# Altium PCB PONG.PcbDoc
Units mm, origin at the board's own origin, x right, y up, seen from the top; angles counter-clockwise.
Board outline 317.75 x 199.14 mm, 2 copper layers (Top Layer, Bottom Layer); 106 components, 226 nets, 1002 pads, 0 vias.
Unrouted connection lines stored in the file: 561.
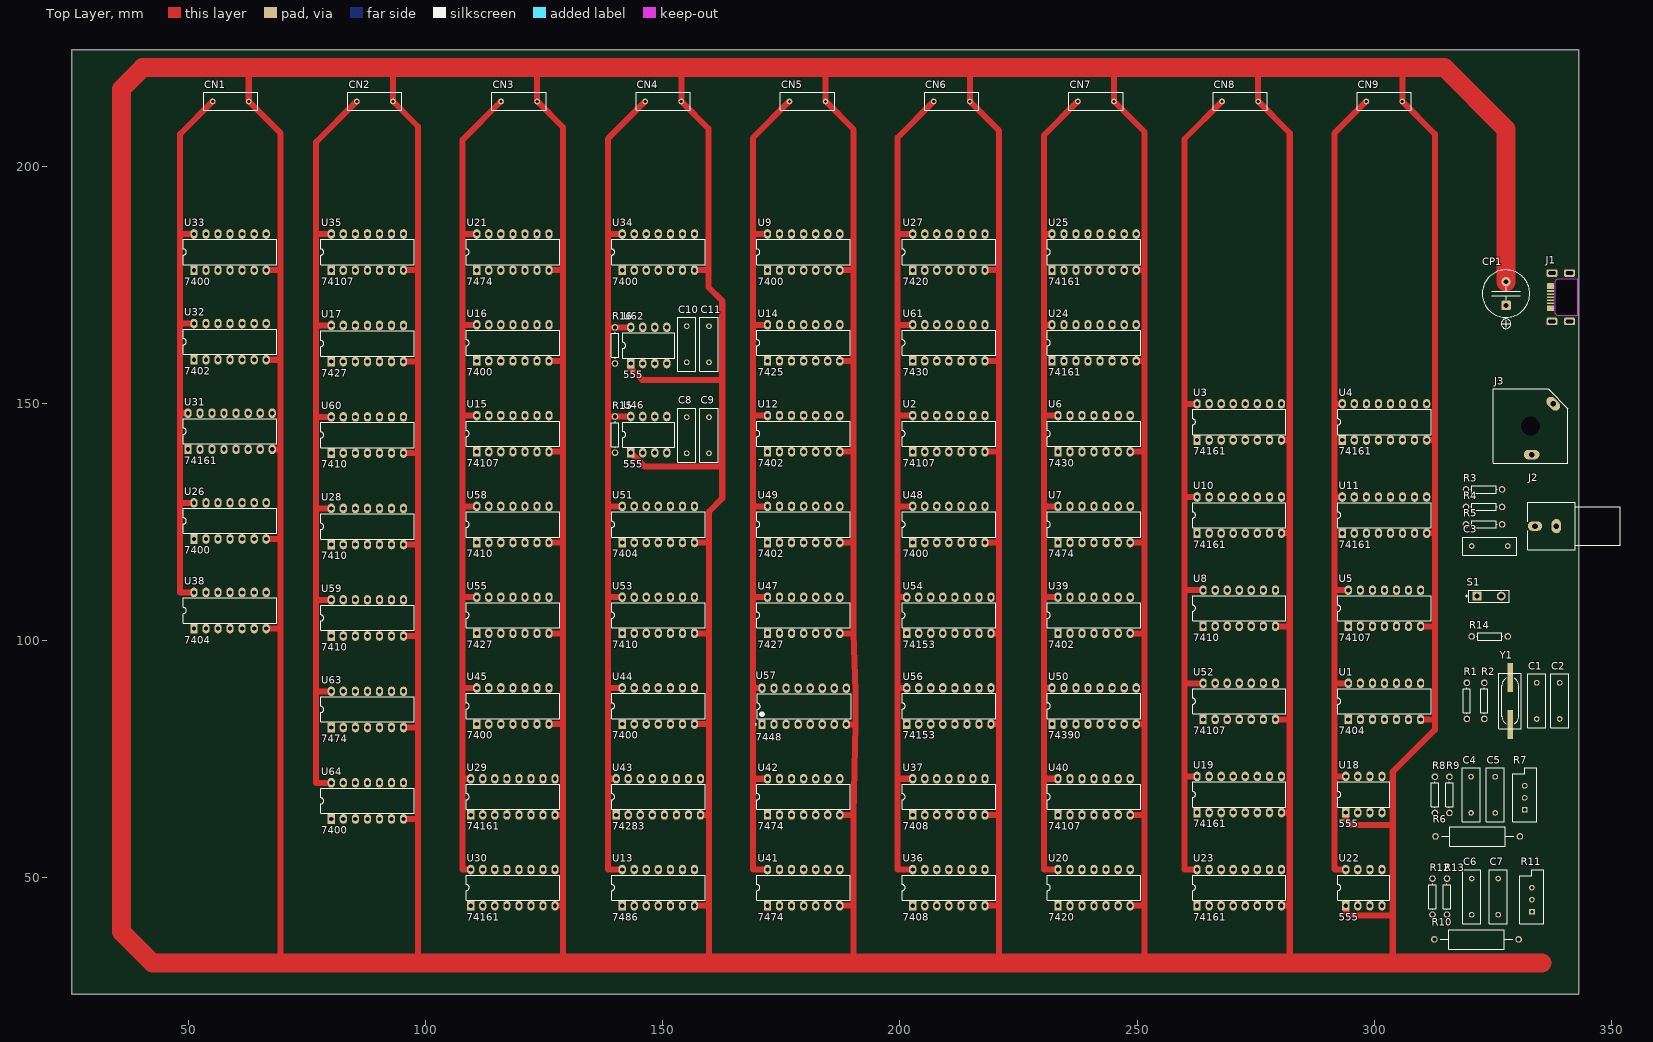
[diagram p0: Top Layer view]
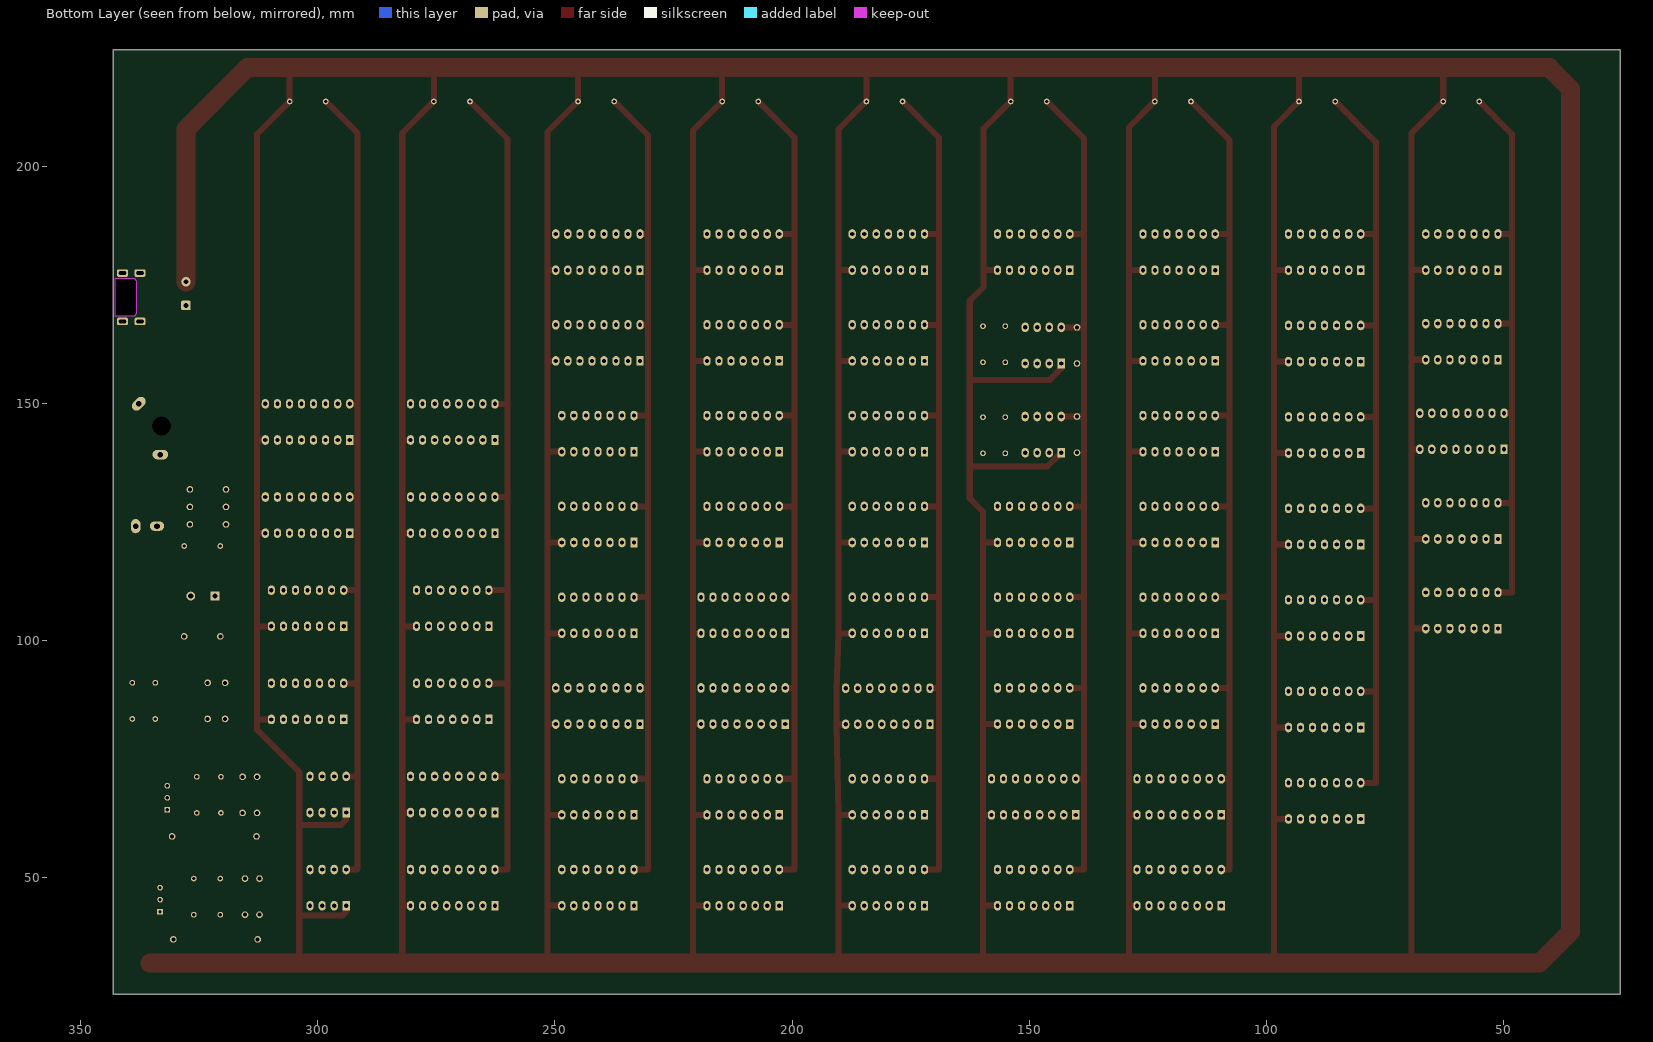
[diagram p1: Bottom Layer view, seen from below]

## Layer stack, top to bottom
Top Solder: solder mask 0.0102, Solder Resist, Dk 3.5
Top Layer: signal copper 0.0356
Dielectric 1: dielectric 0.32, FR-4, Dk 4.8
Bottom Layer: signal copper 0.0356
Bottom Solder: solder mask 0.0102, Solder Resist, Dk 3.5

## Board outline
25.4,25.4 343.154,25.4 343.154,224.536 25.4,224.536

## Design rules (kind name [scope] priority, off if disabled: settings)
Clearance TracksClearance [(OnLayer('Top Layer') OR OnLayer('Bottom Layer'))] p1: gap=0.18 except(1: Track-Track)
Clearance [All] p2: gap=0.18
PolygonConnect [All] p1: connectstyle=Relief reliefconductorwidth=0.254 reliefentries=4 polygonreliefangle="90 Angle" airgapwidth=0.254
RoutingTopology VCC_GND_Shortest [(InNet('VCC') OR InNet('GND'))] p1: topology=Shortest
RoutingTopology HorizBot [OnLayer('Bottom Layer')] p2: topology=Horizontal
RoutingTopology VertTop [OnLayer('Top Layer')] p3: topology=Vertical
RoutingTopology [All] p4: topology=Shortest
RoutingVias [All] p1: holewidth=0.711 width=1.27 viastyle="Through Hole" minholewidth=0.711 minwidth=1.27 maxholewidth=0.711 maxwidth=1.27
SMDNeckDown [All] p1: percent=50.000
SolderMaskExpansion [All] p1: expansion=0.102
Width "Power Width" [(InNet('VCC') OR InNet('GND'))] p1: maxlimit=4 minlimit=0.508 preferedwidth=0.508
Width [All] p2: maxlimit=0.508 minlimit=0.508 preferedwidth=0.508
29 further rules are at their usual default settings.

## Classes and differential pairs
component class VSYNC: U10 U11 U12
component class VertBallCounter: U29 U30
component class VertBallControl: U36 U37 U38 U39 U40 U41 U42 U43
component class SYNC-VideoSum: C3 J2 R3 R4 R5 U13 U14
component class Sound: C10 C11 J3 R16 U62 U63 U64
component class ScoreDisplay_2: U58 U59 U60 U61
component class ScoreDisplay_1: U54 U55 U56 U57
component class ScoreCount: U49 U50 U51 U52 U53
component class POWER: CN1 CN2 CN3 CN4 CN5 CN6 CN7 CN8 CN9 CP1 J1
component class Paddle_2: C6 C7 R10 R11 R12 R13 U21 U22 U23
component class Paddle_1: C4 C5 R6 R7 R8 R9 U18 U19 U20
component class Net: U15 U16 U17
component class HSYNC: U3 U4 U5 U6 U7 U8 U9
component class HorizBallCounter: U24 U25 U26 U27 U28
component class HorizBallControl: U31 U32 U33 U34 U35
component class GameControl: C8 C9 R14 R15 S1 U44 U45 U46 U47 U48
component class CLK: C1 C2 R1 R2 U1 U2 Y1

## Components (designator, comment, footprint, x,y, rotation, side; value= is the part's Value field where it differs from the comment)
C1 "Cap" RAD-0.3 334.264,87.249 r270 top
C2 "Cap" RAD-0.3 339.09,87.249 r270 top
C3 "Cap" RAD-0.3 324.358,119.888 r0 top
C4 "Cap" RAD-0.3 320.421,67.437 r90 top
C5 "Cap" RAD-0.3 325.501,67.437 r90 top
C6 "Cap" RAD-0.3 320.548,45.974 r90 top
C7 "Cap" RAD-0.3 326.136,45.974 r270 top
C8 "Cap" RAD-0.3 155.067,143.256 r90 top
C9 "Cap" RAD-0.3 159.766,143.256 r90 top
C10 "Cap" RAD-0.3 155.067,162.433 r90 top
C11 "Cap" RAD-0.3 159.766,162.433 r90 top
CN1 "Cap" RAD-0.3 58.928,213.614 r180 top
CN2 "Cap" RAD-0.3 89.329,213.614 r180 top
CN3 "Cap" RAD-0.3 119.729,213.614 r180 top
CN4 "Cap" RAD-0.3 150.13,213.614 r180 top
CN5 "Cap" RAD-0.3 180.53,213.614 r180 top
CN6 "Cap" RAD-0.3 210.931,213.614 r180 top
CN7 "Cap" RAD-0.3 241.332,213.614 r180 top
CN8 "Cap" RAD-0.3 271.732,213.614 r180 top
CN9 "Cap" RAD-0.3 302.133,213.614 r180 top
CP1 "Cap" CAPE10.0MM_Rad_10x14mm 327.787,173.101 r90 top
J1 "USB Micro Type B (recommended if hand soldering)" USB_Micro-B_FCI_SMD 342.773,172.339 r90 top
J2 "Video OUT" RCA/4.5-H2 342.392,124.079 r0 top
J3 "Audio OUT" JACK/6-V2 332.994,145.161 r270 top
R1 "Res1" AXIAL-0.3 319.532,87.249 r270 top
R2 "Res1" AXIAL-0.3 323.215,87.249 r270 top
R3 "Res1" AXIAL-0.3 323.155,131.826 r0 top
R4 "Res1" AXIAL-0.3 323.155,128.143 r0 top
R5 "Res1" AXIAL-0.3 323.155,124.46 r0 top
R6 "Res Adj1" AXIAL-0.7 321.818,58.674 r0 top
R7 "RPot" VR5 331.724,66.802 r90 top
R8 "Res1" AXIAL-0.3 312.801,67.437 r270 top
R9 "Res1" AXIAL-0.3 315.849,67.437 r270 top
R10 "Res Adj1" AXIAL-0.7 321.564,36.957 r0 top
R11 "RPot" VR5 333.248,45.339 r90 top
R12 "Res1" AXIAL-0.3 312.293,45.974 r270 top
R13 "Res1" AXIAL-0.3 315.341,45.974 r270 top
R14 "Res1" AXIAL-0.3 324.358,100.838 r180 top
R15 "Res1" AXIAL-0.3 139.954,143.383 r90 top
R16 "Res1" AXIAL-0.3 139.954,162.179 r90 top
S1 "COIN SW" SPST-2 324.231,109.347 r0 top
U1 "7404" N014 302.165,87.147 r0 top
U2 "74107" N014D 210.328,143.583 r0 top
U3 "74161" N016 271.553,146.05 r0 top
U4 "74161" N016 302.165,146.05 r0 top
U5 "74107" N014 302.165,106.782 r0 top
U6 "7430" N014 240.94,143.583 r0 top
U7 "7474" N014D 240.94,124.442 r0 top
U8 "7410" N014 271.553,106.782 r0 top
U9 "7400" N014 179.716,181.864 r0 top
U10 "74161" N016 271.553,126.416 r0 top
U11 "74161" N016 302.165,126.416 r0 top
U12 "7402" N014 179.716,143.583 r0 top
U13 "7486" N014 149.089,47.879 r0 top
U14 "7425" N014 179.716,162.723 r0 top
U15 "74107" N014 118.423,143.583 r0 top
U16 "7400" N014 118.423,162.723 r0 top
U17 "7427" N014 87.757,162.581 r0 top
U18 "555" P008 297.815,67.513 r0 top
U19 "74161" N016 271.553,67.513 r0 top
U20 "7420" N014 240.94,47.879 r0 top
U21 "7474" N014D 118.423,181.864 r0 top
U22 "555" P008 297.815,47.879 r0 top
U23 "74161" N016 271.553,47.879 r0 top
U24 "74161" N016 240.94,162.723 r0 top
U25 "74161" N016 240.94,181.864 r0 top
U26 "7400" N014 58.801,125.19 r0 top
U27 "7420" N014 210.328,181.864 r0 top
U28 "7410" N014 87.757,124.015 r0 top
U29 "74161" N016 118.423,67.02 r0 top
U30 "74161" N016 118.423,47.879 r0 top
U31 "74161" N016 58.801,144.082 r0 top
U32 "7402" N014 58.801,162.973 r0 top
U33 "7400" N014 58.801,181.864 r0 top
U34 "7400" N014 149.089,181.864 r0 top
U35 "74107" N014 87.757,181.864 r0 top
U36 "7408" N014 210.328,47.879 r0 top
U37 "7408" N014 210.328,67.02 r0 top
U38 "7404" N014 58.801,106.299 r0 top
U39 "7402" N014 240.94,105.301 r0 top
U40 "74107" N014 240.94,67.02 r0 top
U41 "7474" N014D 179.716,47.879 r0 top
U42 "7474" N014D 179.716,67.02 r0 top
U43 "74283" N016D#1 149.089,67.02 r0 top
U44 "7400" N014 149.089,86.16 r0 top
U45 "7400" N014 118.423,86.16 r0 top
U46 "555" P008 147.066,143.383 r0 top
U47 "7427" N014 179.716,105.301 r0 top
U48 "7400" N014 210.328,124.442 r0 top
U49 "7402" N014 179.716,124.442 r0 top
U50 "74390" N016 240.94,86.16 r0 top
U51 "7404" N014 149.089,124.442 r0 top
U52 "74107" N014 271.553,87.147 r0 top
U53 "7410" N014 149.089,105.301 r0 top
U54 "74153" N016 210.328,105.301 r0 top
U55 "7427" N014 118.423,105.301 r0 top
U56 "74153" N016 210.328,86.16 r0 top
U57 "7448" N016D#2 179.832,86.106 r90 top
U58 "7410" N014 118.423,124.442 r0 top
U59 "7410" N014 87.757,104.733 r0 top
U60 "7410" N014 87.757,143.298 r0 top
U61 "7430" N014 210.328,162.723 r0 top
U62 "555" P008 147.066,162.179 r0 top
U63 "7474" N014D 87.757,85.45 r0 top
U64 "7400" N014 87.757,66.167 r0 top
Y1 "14.318 Mhz" XTAL-RU49/4 328.676,82.296 r90 top

## Footprints (in the part's own frame and the unit in brackets; to place one, negate y for a bottom-side part, rotate by r counter-clockwise, add the part's x,y. Pads: shape width x height; smd on the part's side, far side on the other; paste and mask are expansions set on the pad)
AXIAL-0.3 [mm] "Axial Device, Thru-Hole; 2 Leads; 0.3 in Pin Spacing"
  round 1.4 hole 0.85: 1(-3.81,0) 2(3.81,0)
  silkscreen extent -2.77,-0.76 2.77,0.76
AXIAL-0.7 [mm] "Axial Device, Thru-Hole; 2 Leads; 0.7 in Pin Spacing"
  round 1.4 hole 0.85: 1(-8.89,0) 2(8.89,0)
  silkscreen extent -7.62,-2.03 7.62,2.03
CAPE10.0MM_Rad_10x14mm [mm] "10mm Pitch Radial Capacitor 10x14mm DxH"
  round 0.5 on Mech15: 0(0,0)
  rrect25% 2x2 hole 0.965: 1(-2.5,0)
  round 2 hole 0.965: 2(2.5,0)
  silkscreen extent -7.37,-5 5,5, body extent -5.25,-5.24 5.21,5.24, height 13.99
JACK/6-V2 [mm] "Connector; Jack Socket, 1/4\" [6.5mm], Thru-Hole, 2 Position, Vertical, Body 15.7 x 15.7 x 31 mm (WxTxH)"
  oval 2x3.3 hole 1.2: 1(6,0.2)
  oval 2x3.3 hole 1.2 rot 135: 5(-4.738,4.738)
  round 3.7 hole 4: MH1(0,0)
  silkscreen extent -7.85,-7.85 7.85,7.85
N014 [mil] "DIP; 14 Leads; Row Spacing 7.62 mm; Pitch 2.54 mm"
  rect 60x80 hole 35.43: 1(-300,-150)
  oval 60x80 hole 35.43: 2(-200,-150) 3(-100,-150) 4(0,-150) 5(100,-150) 6(200,-150) 7(300,-150) 8(300,150) 9(200,150) 10(100,150) 11(0,150) 12(-100,150) 13(-200,150) 14(-300,150)
  silkscreen extent -388,-104 388,104
N014D [mil] "DIP; 14 Leads; Row Spacing 7.62 mm; Pitch 2.54 mm"
  rect 60x80 hole 35.43: 1(-300,-150)
  oval 60x80 hole 35.43: 2(-200,-150) 3(-100,-150) 4(0,-150) 5(100,-150) 6(200,-150) 7(300,-150) 8(300,150) 9(200,150) 10(100,150) 11(0,150) 12(-100,150) 13(-200,150) 14(-300,150)
  silkscreen extent -388,-104 388,104
N016 [mil] "DIP; 16 Leads; Row Spacing 7.62 mm; Pitch 2.54 mm"
  rect 60x80 hole 35.43: 1(-350,-150)
  oval 60x80 hole 35.43: 2(-250,-150) 3(-150,-150) 4(-50,-150) 5(50,-150) 6(150,-150) 7(250,-150) 8(350,-150) 9(350,150) 10(250,150) 11(150,150) 12(50,150) 13(-50,150) 14(-150,150) 15(-250,150) 16(-350,150)
  silkscreen extent -388,-104 388,104
N016D#1 [mil] "DIP; 16 Leads; Row Spacing 7.62 mm; Pitch 2.54 mm"
  rect 60x80 hole 35.43: 1(-350,-150)
  oval 60x80 hole 35.43: 2(-250,-150) 3(-150,-150) 4(-50,-150) 5(50,-150) 6(150,-150) 7(250,-150) 8(350,-150) 9(350,150) 10(250,150) 11(150,150) 12(50,150) 13(-50,150) 14(-150,150) 15(-250,150) 16(-350,150)
  silkscreen extent -388,-104 388,104
N016D#2 [mil] "DIP, 16-Leads, Row Spacing 7.62mm, Pitch 2.54mm, Body 19.31x6.35mm"
  rect 80x60 hole 35.43: 1(-150,350)
  oval 80x60 hole 35.43: 2(-150,250) 3(-150,150) 4(-150,50) 5(-150,-50) 6(-150,-150) 7(-150,-250) 8(-150,-350) 9(150,-350) 10(150,-250) 11(150,-150) 12(150,-50) 13(150,50) 14(150,150) 15(150,250) 16(150,350)
  silkscreen extent -155,-390 104,406, body extent -130,-390 130,390, height 200
P008 [mil] "DIP; 8 Leads; Row Spacing 7.62 mm; Pitch 2.54 mm"
  rect 60x80 hole 35.43: 1(-150,-150)
  oval 60x80 hole 35.43: 2(-50,-150) 3(50,-150) 4(150,-150) 5(150,150) 6(50,150) 7(-50,150) 8(-150,150)
  silkscreen extent -217,-104 217,104
RAD-0.3 [mm] "Radial Cap, Thru-Hole; 2 Leads; 0.3 in Pin Spacing"
  round 1.2 hole 0.7: 1(-3.81,0) 2(3.81,0)
  silkscreen extent -5.71,-1.91 5.72,1.91
RCA/4.5-H2 [mm] "Two Conductor Jack (RCA), Right Angle, Thru-Hole, Body 10 x 10 x 13 mm (WxTxH)"
  oval 2x3 hole 1.2: 1A(-4,0)
  oval 3x2 hole 1.2: 2B(-8.496,0)
  silkscreen extent -10.07,-5 9.5,5
SPST-2 [mm] "Switch; 2 Leads"
  rect 1.85x1.85 hole 1.1: 1(-2.54,0)
  round 1.85 hole 1.1: 2(2.54,0)
  silkscreen extent -4.89,-1.27 4.28,1.27
USB_Micro-B_FCI_SMD [mm]
  round 0.508 on Mech15: 0(0,0)
  rrect20% 0.35x1.5 smd: 1(-1.3,5.6) 2(-0.65,5.6) 3(0,5.6) 4(0.65,5.6) 5(1.3,5.6)
  rrect50% 1.6x2.4 hole 0.8 slot 1.5 at 90 deg: SH(-5.1,1.6) SH(-5.1,5.3) SH(5.1,1.6) SH(5.1,5.3)
  rrect20% 1.2x1.5 smd: SH(-2.35,5.6) SH(2.35,5.6)
  Keep-Out Layer board cut-out: -3.9,0 -3.9,3.797 -3.839,4.103 -3.666,4.362 -3.406,4.536 -3.1,4.597 -3.1,4.597 3.1,4.597 3.406,4.536 3.666,4.362 3.839,4.103 3.9,3.797 3.9,3.797 3.9,0
  body extent -5.35,-21.58 5.35,5.8, height 4.67
VR5 [mm] "Thru-Hole; 3 Leads"
  rect 1.2x1.2 hole 0.7: 1(-2.54,0)
  round 1.2 hole 0.7: 2(0,0) 3(2.54,0)
  silkscreen extent -5.08,-2.54 6.35,2.54
XTAL-RU49/4 [mil]
  rect 240x47.24 smd: 1(0,0) 2(390,0)
  silkscreen extent -35,-90 425,95, body extent -78,-90 468,95, height 120

## Part data
C1 C2 C3 C4 C5 C6 C7 C8 C9 C10 C11 CN1 CN2 CN3 CN4 CN5 CN6 CN7 CN8 CN9 CP1: "Capacitor"
J1: library part USB_Micro_TypeB_FCI, "Connector SMD-THD USB Micro Type B middle mount"
J2: library part RCA, "RCA Phono Jack, Right Angle, Thru-Hole, Snap-In"
J3: library part Phonejack2, "Jack Socket, 1/4\" [6.5mm], Thru-Hole, Vertical, 2-Conductor Open Circuit"
R1 R2 R3 R4 R5 R8 R9 R12 R13 R14 R15 R16: "Resistor"
R6 R10: "Variable Resistor"
R7 R11: "Potentiometer"
S1: library part SW-PB, "Switch"
U1 U38 U51: library part SN74LS04N, "Hex Inverter"
U2: library part SN74HC107N, "Dual J-K Negative-Edge-Triggered Flip-Flop with Clear"
U3 U4 U10 U11 U19 U23 U24 U25 U29 U30 U31: library part SN74LS161AN, "Synchronous 4-Bit Counter"
U5 U15 U35 U40 U52: library part SN74LS107AN, "Dual J-K Flip-Flop with Clear"
U6 U61: library part SN74LS30N, "8-Input Positive-NAND Gate"
U7 U21 U41 U42 U63: library part SN74LS74AN, "Dual D-Type Positive-Edge-Triggered Flip-Flop with Preset and Clear"
U8 U28 U53 U58 U59 U60: library part SN74LS10N, "Triple 3-Input Positive-NAND Gate"
U9 U16 U26 U33 U34 U44 U45 U48 U64: library part SN74LS00N, "Quadruple 2-Input Positive-NAND Gate"
U12 U32 U39 U49: library part SN74LS02N, "Quadruple 2-Input Positive-NOR Gate"
U13: library part SN74LS86AN, "Quadruple 2-Input Exclusive-OR Gate"
U14: library part SN7425N, "Dual 4-Input NOR Gate with Strobe"
U17 U47 U55: library part SN74LS27N, "Triple 3-Input Positive-NOR Gate"
U18 U22 U46 U62: library part NE555P, "Precision Timer"
U20 U27: library part SN74LS20N, "Dual 4-Input Positive-NAND Gate"
U36 U37: library part SN74LS08N, "Quadruple 2-Input Positive-AND Gate"
U43: library part SN54S283FK, "4-Bit Binary Full Adder with Fast Carry"
U50: library part SN74LS390N, "Dual 4-Bit Decade and Binary Counter"
U54 U56: library part SN74LS153N, "Dual 4-Line to 1-Line Data Selector/Multiplexer"
U57: library part SN74LS48N, "BCD-to-Seven-Segment Decoder/Driver"
Y1: library part XTAL, "Crystal Oscillator"

## Nets (pads, with @x,y where several pads share a name; then routed paths per layer and width w, separated by ;. In a path a pad name is that pad's centre, name@x,y a point inside that pad or via, vN(x,y) a via of type N, cw(c..) or ccw(c..) an arc to the next point about the centre after c; other vN are vias at no path point)
1H: U3.14
1V: U8.3 U10.14
2H: U3.13 U6.1
2V: U10.13
4H: U3.12 U6.2 U21.3 U48.12 U53.9 U55.3 U55.9
4V: U8.4 U8.10 U10.12 U17.1
7S_A: U57.13 U59.3
7S_B: U57.12 U58.9
7S_C: U57.11 U59.2
7S_D: U57.10 U60.13
7S_E: U57.9 U58.5
7S_F: U57.15 U58.2
7S_G: U57.14 U59.9
8H: U3.11 U48.13 U53.10 U55.4 U55.10
8V: U9.12 U9.13 U10.11
16H: U4.14 U8.1 U9.10 U51.3 U53.11
16V: U11.14 U12.6 U51.5 U58.4 U59.13 U60.2
32H: U4.13 U54.14 U56.14
32V: U11.13 U49.8 U49.9 U64.1
64H: U4.12 U6.6 U8.2 U8.13 U47.10 U53.4 U54.2 U56.2
64V: U11.12 U14.12
128H: U4.11 U6.11 U16.9 U21.2 U47.3 U47.4 U47.5
128V: U11.11 U14.10
256H: U5.3 U6.12 U15.1 U16.1 U17.3 U36.5 U36.13 U37.5 U47.9 U53.5
256V: U5.5 U8.5
\256H: U5.2 U15.4 U17.11 U32.5 U36.2 U36.10 U37.2
\256V: U5.6 U18.2 U22.2
\ATTRACT: U21.4 U26.1 U38.13 U39.4
\CLR: U15.10 U24.1 U25.1 U26.3
\HBLANK: U9.3 U9.4 U24.10
\HIT: U48.3 U63.1
\HIT1: U21.13 U45.8 U45.13
\HIT2: U21.10 U45.6 U45.12
\HRESET: U3.1 U4.1 U5.13 U7.5 U9.5
\HSYNC: U9.8 U13.1 U19.2 U23.2 U29.2 U30.2
\HVID: U12.8 U27.6 U27.9 U27.10 U27.12 U27.13 U39.8
\MISS: U44.2 U48.6 U51.1 U62.2
\RUN: U39.6 U44.13 U45.3 U47.1
\SCORE1_10: U40.6 U54.6 U54.10 U56.10
\SCORE2_10: U52.2 U54.4 U54.12 U56.12
\SERVE: U42.9 U52.10
\SRST: R14.1 S1.2 U38.9 U40.10 U44.1 U44.12 U52.13
\STOPG1: U28.8 U44.4
\STOPG2: U44.5 U53.12
\VBLANK: U12.1 U12.5 U29.10
\VPAD1: U16.6 U17.4
\VPAD2: U16.11 U17.10
\VRESET: U5.10 U7.9 U10.1 U11.1
\VSYNC: U8.8 U13.2
\VVID: U12.9 U12.11 U12.12 U28.6 U39.9 U52.11
A: U56.7 U57.7
A6: U29.3 U43.4
AA: U24.3 U34.8
ATTRACT: U26.10 U38.3 U38.12 U48.10 U64.12
B: U56.9 U57.1
B1: U19.13 U20.2 U36.1
B2: U20.10 U23.13 U36.4
B6: U29.4 U43.1
BALL: U12.10 U14.1
BB: U24.4 U34.6 U34.10
C: U54.7 U57.2
C1: U19.12 U20.4 U36.9
C2: U20.12 U23.12 U36.12
C5-EN: U14.8 U57.4
C6: U29.5 U43.13
CLK: U2.3 U3.2 U4.2 U7.3 U7.11 U15.12 U24.2 U25.2
D: U54.9 U57.6
D1: U19.11 U20.5 U37.1
D2: U20.13 U23.11 U37.4
D6: U29.6 U43.10
GND: C1.1 C2.1 C4.1 C5.1 C6.1 C7.1 C8.1 C9.1 C10.1 C11.1 CN1.1 CN2.1 CN3.1 CN4.1 CN5.1 CN6.1 CN7.1 CN8.1 CN9.1 CP1.2 J1.5 J2.1A J3.5 R7.1 R11.1 S1.1 U1.7 U2.7 U3.8 U4.8 U5.7 U6.7 U7.7 U8.7 U9.7 U10.8 U11.8 U12.7 U13.7 U14.7 U15.7 U16.7 U17.7 U18.1 U19.8 U20.7 U21.7 U22.1 U23.8 U24.5 U24.8 U25.3 U25.4 U25.5 U25.8 U26.7 U27.7 U28.7 U29.8 U30.3 U30.4 U30.5 U30.6 U30.8 U31.8 U32.7 U33.7 U34.7 U35.7 U35.11 U36.7 U37.7 U38.7 U39.7 U40.7 U41.7 U42.7 U43.7 U43.8 U43.11 U43.12 U44.7 U45.7 U46.1 U47.7 U48.7 U49.7 U50.8 U51.7 U52.7 U53.7 U54.1 U54.8 U54.15 U55.7 U56.1 U56.8 U56.15 U57.8 U58.7 U59.7 U60.7 U61.7 U62.1 U63.7 U64.7 | length 2763.3
  Top Layer w1.27: 62.738,220.726 CN1.1 69.469,206.883 69.469,178.054 ; U38.7 69.469,102.489 ; U26.7 69.374,121.38 ; U32.7 69.469,159.163 ; U33.7 69.469,178.054 ; U31.8 69.469,140.272 ; 69.469,32.004 69.469,102.489 ; 93.139,220.726 CN2.1 98.425,208.328 98.425,178.054 ; U64.7 98.425,62.357 ; U63.7 98.425,81.64 ; U59.7 98.425,100.923 ; U28.7 98.425,120.206 ; U60.7 98.425,139.488 ; U17.7 98.425,158.771 ; U35.7 98.425,178.054 ; 98.425,32.004 98.425,62.357 ; 123.539,220.726 CN3.1 129.032,208.121 129.032,178.054 ; U45.7 129.032,82.35 ; U55.7 129.032,101.491 ; U58.7 129.032,120.632 ; U15.7 129.032,139.773 ; U16.7 129.032,158.913 ; U21.7 129.032,178.054 ; U30.8 129.032,44.069 ; U29.8 129.032,63.21 ; 128.905,32.004 129.032,32.004 129.032,44.069 ; U46.1 146.177,136.652 162.56,136.652 ; U62.1 143.256,157.353 145.669,154.94 162.56,154.94 ; 153.94,220.726 CN4.1 159.639,207.915 159.639,178.054 ; U13.7 159.766,44.069 ; U44.7 159.766,82.35 ; U53.7 159.766,101.491 ; U51.7 159.748,120.632 159.766,120.65 ; U34.7 159.639,178.054 ; U43.8 159.766,63.21 ; 159.766,32.004 159.766,44.069 ; 184.34,220.726 CN5.1 190.246,207.708 190.246,178.054 ; U41.7 190.246,44.069 ; U42.7 190.246,63.21 ; U47.7 190.246,101.491 ; U49.7 190.246,120.632 ; U12.7 190.246,139.773 ; U14.7 190.246,158.913 ; U9.7 190.246,178.054 ; U57.8 190.627,82.296 ; 190.246,32.004 190.246,44.069 ; 214.741,220.726 CN6.1 220.853,207.502 220.853,178.054 ; U36.7 220.853,44.069 ; U37.7 220.853,63.21 ; U48.7 220.853,120.632 ; U2.7 220.853,139.773 ; U61.7 220.853,158.913 ; U27.7 220.853,178.054 ; U56.8 220.853,82.35 ; U54.8 220.853,101.491 ; 220.853,32.004 220.853,44.069 ; 245.142,220.726 CN7.1 251.587,207.169 251.587,178.054 ; U20.7 251.587,44.069 ; U40.7 251.587,63.21 ; U39.7 251.587,101.491 ; U7.7 251.587,120.632 ; U6.7 251.587,139.773 ; U50.8 251.587,82.35 ; U24.8 251.587,158.913 ; U25.8 251.587,178.054 ; 251.587,32.004 251.587,44.069 ; 275.542,220.726 CN8.1 282.194,206.962 282.194,142.24 ; U52.7 282.194,83.337 ; U8.7 282.194,102.972 ; U23.8 282.194,44.069 ; U19.8 282.194,63.703 ; U10.8 282.194,122.606 ; U3.8 282.194,142.24 ; 282.194,32.004 282.194,44.069 ; U22.1 294.005,42.799 294.767,42.037 303.911,42.037 ; U18.1 294.005,62.23 295.148,61.087 303.911,61.087 ; 303.911,32.004 303.911,42.037 ; 305.943,220.726 CN9.1 312.801,206.756 312.801,142.24 ; U1.7 312.801,83.337 ; U5.7 312.801,102.972 ; U11.8 312.801,122.606 ; U4.8 312.801,142.24 ; 69.469,102.489 69.469,140.272 ; 69.469,140.272 69.469,159.163 ; 69.469,159.163 69.469,178.054 ; 98.425,62.357 98.425,81.64 ; 98.425,81.64 98.425,100.923 ; 98.425,100.923 98.425,120.206 ; 98.425,120.206 98.425,139.488 ; 98.425,139.488 98.425,158.771 ; 98.425,158.771 98.425,178.054 ; 129.032,44.069 129.032,63.21 ; 129.032,63.21 129.032,82.35 ; 129.032,82.35 129.032,101.491 ; 129.032,101.491 129.032,120.632 ; 129.032,120.632 129.032,139.773 ; 129.032,139.773 129.032,158.913 ; 129.032,158.913 129.032,178.054 ; 159.639,178.054 159.639,174.498 162.56,171.577 162.56,154.94 ; 159.766,44.069 159.766,63.21 ; 159.766,63.21 159.766,82.35 ; 159.766,82.35 159.766,101.491 ; 159.766,101.491 159.766,120.65 ; 159.766,120.65 159.766,127.127 162.56,129.921 162.56,136.652 ; 162.56,136.652 162.56,154.94 ; 190.246,44.069 190.246,63.21 ; 190.246,63.21 190.627,82.296 ; 190.246,101.491 190.627,89.408 190.627,82.296 ; 190.246,101.491 190.246,120.632 ; 190.246,120.632 190.246,139.773 ; 190.246,139.773 190.246,158.913 ; 190.246,158.913 190.246,178.054 ; 220.853,44.069 220.853,63.21 ; 220.853,63.21 220.853,82.35 ; 220.853,82.35 220.853,101.491 ; 220.853,101.491 220.853,120.632 ; 220.853,120.632 220.853,139.773 ; 220.853,139.773 220.853,158.913 ; 220.853,158.913 220.853,178.054 ; 251.587,44.069 251.587,63.21 ; 251.587,63.21 251.587,82.35 ; 251.587,82.35 251.587,101.491 ; 251.587,101.491 251.587,120.632 ; 251.587,120.632 251.587,139.773 ; 251.587,139.773 251.587,158.913 ; 251.587,158.913 251.587,178.054 ; 282.194,44.069 282.194,63.703 ; 282.194,63.703 282.194,83.337 ; 282.194,83.337 282.194,102.972 ; 282.194,102.972 282.194,122.606 ; 282.194,122.606 282.194,142.24 ; 303.911,42.037 303.911,61.087 ; 303.911,61.087 303.911,72.263 312.801,81.153 312.801,83.337 ; 312.801,83.337 312.801,102.972 ; 312.801,102.972 312.801,122.606 ; 312.801,122.606 312.801,142.24
  Top Layer w4: 128.905,32.004 98.425,32.004 69.469,32.004 42.418,32.004 35.941,38.481 35.941,216.281 40.386,220.726 62.738,220.726 93.139,220.726 123.539,220.726 153.94,220.726 184.34,220.726 214.741,220.726 245.142,220.726 275.542,220.726 305.943,220.726 314.833,220.726 327.787,207.772 CP1.2 ; 129.032,32.004 159.766,32.004 190.246,32.004 220.853,32.004 251.587,32.004 282.194,32.004 303.911,32.004 335.407,32.004
HBLANK: U9.2 U9.6 U9.9 U48.5
HIT: U38.1 U41.3 U41.11 U41.13 U42.1 U42.3 U45.11 U48.1 U48.2
"HIT SOUND": U31.2 U60.4 U64.8
"HIT SOUND EN": U63.6 U64.9
HRESET: U7.6 U10.2 U11.2
L: U21.9 U34.2 U39.11
MISSED: U39.12 U48.8 U49.3
MOVE: U34.1 U34.4 U34.11 U35.4
NET: U14.2 U17.12
NetC1_2: C1.2 R1.2 U1.1 Y1.1
NetC2_2: C2.2 R2.2 Y1.2
NetC3_1: C3.1 R3.2 R4.2 R5.2
NetC3_2: C3.2 J2.2B
NetC4_2: C4.2 R8.1 U18.6 U18.7
NetC5_2: C5.2 R7.3 R9.2
NetC6_2: C6.2 R12.1 U22.6 U22.7
NetC7_2: C7.2 R11.3 R13.2
NetC8_2: C8.2 U46.5
NetC9_2: C9.2 R15.1 U46.6 U46.7
NetC10_2: C10.2 U62.5
NetC11_2: C11.2 R16.1 U62.6 U62.7
NetJ3_1: J3.1 U64.11
NetR1_1: R1.1 R2.1 U1.2 U2.12
NetR6_1: R6.1 R8.2
NetR9_1: R9.1 U18.5
NetR10_1: R10.1 R12.2
NetR13_1: R13.1 U22.5
NetU1_3: U1.3 U13.3
NetU1_5: U1.5 U14.6
NetU1_8: U1.8 U16.4
NetU1_9: U1.9 U18.3 U19.1
NetU1_10: U1.10 U16.12
NetU1_11: U1.11 U22.3 U23.1
NetU1_12: U1.12 U21.11
NetU1_13: U1.13 U26.8
NetU3_15: U3.15 U4.10
NetU4_15: U4.15 U5.12
NetU5_9: U5.9 U11.15
NetU6_8: U6.8 U7.2
NetU7_12: U7.12 U8.6
NetU8_11: U8.11 U9.11
NetU8_12: U8.12 U9.1
NetU10_15: U10.15 U11.10
NetU13_4: U13.4 U41.5
NetU13_5: U13.5 U13.10 U13.13 U40.3
NetU13_6: U13.6 U43.5
NetU13_8: U13.8 U43.3
NetU13_9: U13.9 U41.9
NetU13_11: U13.11 U38.5 U43.14
NetU13_12: U13.12 U42.5
NetU14_9: U14.9 U49.4
NetU14_13: U14.13 U49.10
NetU15_2: U15.2 U16.2
NetU15_5: U15.5 U27.5 U28.13
NetU15_9: U15.9 U25.15 U27.4 U28.2
NetU16_3: U16.3 U17.13
NetU16_5: U16.5 U19.10 U20.6
NetU16_8: U16.8 U17.5 U17.9
NetU16_10: U16.10 U21.6
NetU16_13: U16.13 U20.8 U23.10
NetU19_14: U19.14 U20.1
NetU20_9: U20.9 U23.14
NetU24_9: U24.9 U25.9 U28.12
NetU24_11: U24.11 U27.2
NetU24_12: U24.12 U27.1
NetU24_15: U24.15 U25.7 U28.1
NetU26_4: U26.4 U29.15 U30.7
NetU26_6: U26.6 U29.9 U30.9
NetU26_11: U26.11 U31.10 U33.1
NetU26_12: U26.12 U31.12 U32.2
NetU26_13: U26.13 U31.11 U32.3
NetU27_8: U27.8 U48.4
NetU28_3: U28.3 U29.12
NetU28_4: U28.4 U29.11
NetU32_1: U32.1 U33.9 U33.10
NetU32_4: U32.4 U35.9 U35.12
NetU32_8: U32.8 U36.3
NetU32_9: U32.9 U36.6
NetU32_10: U32.10 U41.2
NetU32_11: U32.11 U36.8
NetU32_12: U32.12 U36.11
NetU32_13: U32.13 U41.12
NetU33_2: U33.2 U33.8 U33.12
NetU33_3: U33.3 U33.4
NetU33_6: U33.6 U35.13
NetU33_11: U33.11 U35.10
NetU34_3: U34.3 U34.9
NetU34_12: U34.12 U35.3 U35.8
NetU34_13: U34.13 U35.5
NetU37_3: U37.3 U39.2
NetU37_6: U37.6 U39.3
NetU38_2: U38.2 U40.13
NetU38_4: U38.4 U41.1
NetU38_6: U38.6 U43.6
NetU38_10: U38.10 U45.2
NetU39_1: U39.1 U42.2
NetU39_10: U39.10 U45.5 U45.9
NetU39_13: U39.13 U50.1
NetU42_12: U42.12 U42.13 U47.12
NetU44_8: U44.8 U46.2
NetU46_3: U46.3 U47.13
NetU47_6: U47.6 U47.11 U53.3
NetU47_8: U47.8 U49.5
NetU48_9: U48.9 U51.2
NetU48_11: U48.11 U49.11
NetU49_1: U49.1 U50.15
NetU49_6: U49.6 U55.12
NetU49_12: U49.12 U51.4 U55.5 U55.11
NetU49_13: U49.13 U58.11 U59.1
NetU51_6: U51.6 U58.1 U58.10 U59.4 U59.10
NetU51_8: U51.8 U59.11 U60.1
NetU51_9: U51.9 U53.8
NetU52_5: U52.5 U64.5
NetU53_6: U53.6 U55.1 U55.2 U55.13
NetU55_6: U55.6 U58.3 U58.13
NetU55_8: U55.8 U59.5
NetU58_6: U58.6 U61.2
NetU58_8: U58.8 U61.3
NetU58_12: U58.12 U61.1
NetU59_6: U59.6 U61.6
NetU59_8: U59.8 U61.11
NetU59_12: U59.12 U61.4
NetU60_6: U60.6 U64.13
NetU60_12: U60.12 U61.12
PAD1: U14.4 U17.6 U42.11 U45.10
PAD2: U14.5 U17.8 U45.4
R: U21.8 U21.12 U34.5 U49.2
"RST SPEED": U31.1 U44.3 U44.9 U44.10
RUN: U44.11 U45.1
SC: U26.9 U62.3 U64.2
SCORE: R5.1 U61.8
SCORE1_1: U28.9 U50.3 U50.4 U56.5
SCORE1_2: U50.5 U56.11
SCORE1_4: U28.10 U50.6 U54.5
SCORE1_8: U40.9 U50.7 U54.11
SCORE1_10: U28.11 U40.5
SCORE2_1: U50.12 U50.13 U53.1 U56.3
SCORE2_2: U50.11 U56.13
SCORE2_4: U50.10 U53.2 U54.3
SCORE2_8: U50.9 U52.12 U54.13
SCORE2_10: U52.3 U53.13
SCORESOUND: U60.5 U64.3
SERVE: U26.2 U42.8
SRST: U38.8 U50.2 U50.14
"STOP G": U38.11 U39.5 U44.6 U47.2
SYNC: R4.1 U1.4
TOPBOTHITSOUND: U60.3 U64.6
VBLANK: U8.9 U12.3 U12.4 U17.2 U40.12 U52.9
VCC: CN1.2 CN2.2 CN3.2 CN4.2 CN5.2 CN6.2 CN7.2 CN8.2 CN9.2 CP1.1 J1.1 R6.2 R7.2 R10.2 R11.2 R14.2 R15.2 R16.2 U1.14 U2.1 U2.4 U2.13 U2.14 U3.3 U3.4 U3.5 U3.6 U3.7 U3.9 U3.10 U3.16 U4.3 U4.4 U4.5 U4.6 U4.7 U4.9 U4.16 U5.1 U5.4 U5.8 U5.11 U5.14 U6.3 U6.4 U6.5 U6.14 U7.1 U7.4 U7.10 U7.13 U7.14 U8.14 U9.14 U10.3 U10.4 U10.5 U10.6 U10.7 U10.9 U10.10 U10.16 U11.3 U11.4 U11.5 U11.6 U11.7 U11.9 U11.16 U12.14 U13.14 U14.3 U14.11 U14.14 U15.8 U15.11 U15.13 U15.14 U16.14 U17.14 U18.4 U18.8 U19.3 U19.4 U19.5 U19.6 U19.7 U19.9 U19.16 U20.14 U21.1 U21.14 U22.4 U22.8 U23.3 U23.4 U23.5 U23.6 U23.7 U23.9 U23.16 U24.6 U24.7 U24.16 U25.6 U25.10 U25.16 U26.14 U27.14 U28.14 U29.1 U29.7 U29.16 U30.1 U30.10 U30.16 U31.3 U31.4 U31.5 U31.6 U31.7 U31.9 U31.16 U32.14 U33.14 U34.14 U35.1 U35.14 U36.14 U37.14 U38.14 U39.14 U40.8 U40.11 U40.14 U41.4 U41.10 U41.14 U42.4 U42.10 U42.14 U43.2 U43.15 U43.16 U44.14 U45.14 U46.4 U46.8 U47.14 U48.14 U49.14 U50.16 U51.14 U52.1 U52.4 U52.14 U53.14 U54.16 U55.14 U56.4 U56.6 U56.16 U57.3 U57.5 U57.16 U58.14 U59.14 U60.14 U61.5 U61.14 U62.4 U62.8 U63.2 U63.4 U63.14 U64.14 | length 1590.8
  Top Layer w1.27: 48.323,147.892 U31.16 ; U38.14 48.26,110.109 48.26,129 ; U26.14 48.26,129 ; U32.14 48.26,166.783 ; U33.14 48.26,185.674 ; CN1.2 48.26,206.756 48.26,185.674 ; U64.14 76.962,69.977 76.962,89.26 ; U63.14 76.962,89.26 ; U59.14 76.962,108.543 ; U28.14 76.962,127.825 ; U60.14 76.962,147.108 ; U17.14 76.962,166.391 ; U35.14 76.962,185.674 ; CN2.2 76.962,205.057 76.962,185.674 ; U30.16 107.823,51.689 107.823,70.83 ; U29.16 107.823,70.83 ; U45.14 107.823,89.97 ; U55.14 107.823,109.111 ; U58.14 107.823,128.252 ; U15.14 107.823,147.393 ; U16.14 107.823,166.533 ; U21.14 107.823,185.674 ; CN3.2 107.823,205.518 107.823,185.674 ; U43.16 138.43,70.83 ; U13.14 138.43,51.689 138.43,70.83 ; U44.14 138.43,89.97 ; U53.14 138.43,109.111 ; U51.14 138.43,128.252 ; U34.14 138.43,185.674 ; U46.8 R15.2 138.43,147.193 ; U62.8 R16.2 138.43,165.989 ; CN4.2 138.43,205.724 138.43,185.674 ; U57.16 169.037,89.916 ; U41.14 169.037,51.689 169.037,70.866 ; U42.14 169.073,70.83 169.037,70.866 ; U47.14 169.037,109.111 ; U49.14 169.037,128.252 ; U12.14 169.037,147.393 ; U14.14 169.037,166.533 ; U9.14 169.037,185.674 ; CN5.2 169.037,205.93 169.037,185.674 ; U56.16 199.517,89.97 ; U54.16 199.517,109.111 ; U36.14 199.517,51.689 199.517,70.83 ; U37.14 199.517,70.83 ; U48.14 199.517,128.252 ; U2.14 199.517,147.393 ; U61.14 199.517,166.533 ; U27.14 199.517,185.674 ; CN6.2 199.517,206.01 199.517,185.674 ; U50.16 230.378,89.97 ; U24.16 230.378,166.533 ; U25.16 230.378,185.674 ; U20.14 230.378,51.689 230.378,70.83 ; U40.14 230.378,70.83 ; U39.14 230.378,109.111 ; U7.14 230.378,128.252 ; U6.14 230.378,147.393 ; CN7.2 230.378,206.47 230.378,185.674 ; U23.16 260,51.689 260,71.323 ; U19.16 260,71.323 ; U10.16 260,130.226 ; U3.16 260,149.86 ; U52.14 260,90.957 ; U8.14 260,110.592 ; CN8.2 260,205.692 260,149.86 ; 291.592,51.816 291.592,71.323 ; 291.719,51.689 U22.8 ; U11.16 291.592,130.226 ; U4.16 291.592,149.86 ; U18.8 291.592,71.323 ; U1.14 291.592,90.957 ; U5.14 291.592,110.592 ; CN9.2 291.592,206.883 291.592,149.86 ; 48.26,129 48.26,166.783 ; 48.26,166.783 48.26,185.674 ; 76.962,89.26 76.962,108.543 ; 76.962,108.543 76.962,127.825 ; 76.962,127.825 76.962,147.108 ; 76.962,147.108 76.962,166.391 ; 76.962,166.391 76.962,185.674 ; 107.823,70.83 107.823,89.97 ; 107.823,89.97 107.823,109.111 ; 107.823,109.111 107.823,128.252 ; 107.823,128.252 107.823,147.393 ; 107.823,147.393 107.823,166.533 ; 107.823,166.533 107.823,185.674 ; 138.43,70.83 138.43,89.97 ; 138.43,89.97 138.43,109.111 ; 138.43,109.111 138.43,128.252 ; 138.43,128.252 138.43,147.193 ; 138.43,147.193 138.43,165.989 ; 138.43,165.989 138.43,185.674 ; 169.037,70.866 169.037,89.916 ; 169.037,89.916 169.037,109.111 ; 169.037,109.111 169.037,128.252 ; 169.037,128.252 169.037,147.393 ; 169.037,147.393 169.037,166.533 ; 169.037,166.533 169.037,185.674 ; 199.517,70.83 199.517,89.97 ; 199.517,89.97 199.517,109.111 ; 199.517,109.111 199.517,128.252 ; 199.517,128.252 199.517,147.393 ; 199.517,147.393 199.517,166.533 ; 199.517,166.533 199.517,185.674 ; 230.378,70.83 230.378,89.97 ; 230.378,89.97 230.378,109.111 ; 230.378,109.111 230.378,128.252 ; 230.378,128.252 230.378,147.393 ; 230.378,147.393 230.378,166.533 ; 230.378,166.533 230.378,185.674 ; 260,71.323 260,90.957 ; 260,90.957 260,110.592 ; 260,110.592 260,130.226 ; 260,130.226 260,149.86 ; 291.592,71.323 291.592,90.957 ; 291.592,90.957 291.592,110.592 ; 291.592,110.592 291.592,130.226 ; 291.592,130.226 291.592,149.86
VIDEO: R3.1 U1.6
VPOS16: U30.14 U64.10
VPOS32: U30.13 U64.4
VPOS256: U26.5 U28.5 U30.15 U63.3
VRESET: U7.8 U12.2 U32.6 U33.5 U33.13
VVID: U12.13 U40.1 U40.4 U52.8
pads on no net: CP1.0 J1.0 J1.2 J1.3 J1.4 J1.SH J3.MH1 U2.2 U2.5 U2.6 U2.8 U2.9 U2.10 U2.11 U6.9 U6.10 U6.13 U15.3 U15.6 U19.15 U20.3 U20.11 U21.5 U23.15 U24.13 U24.14 U25.11 U25.12 U25.13 U25.14 U27.3 U27.11 U29.13 U29.14 U30.11 U30.12 U31.13 U31.14 U31.15 U35.2 U35.6 U37.8 U37.9 U37.10 U37.11 U37.12 U37.13 U40.2 U41.6 U41.8 U42.6 U43.9 U51.10 U51.11 U51.12 U51.13 U52.6 U60.8 U60.9 U60.10 U60.11 U61.9 U61.10 U61.13 U63.5 U63.8 U63.9 U63.10 U63.11 U63.12 U63.13

## Text inside footprints (layer, text, board x,y; h text height)
J2: Mechanical 1 "PCB Edge" at 342.059,119.461 h0.25 r90; Mechanical 1 "Alert PCB fab to slot details" at 332.335,131.921 h0.3; Mechanical 1 "Slot 1.2x2.2mm, PTH" at 332.335,131.421 h0.3; Mechanical 1 "Assign keep-out area to slot" at 332.335,132.421 h0.3; Mechanical 1 "Mech 1 - Slot cut-out" at 332.335,130.921 h0.3; Mechanical 1 "Mech 2 - Clearance, move to internal plane if present" at 332.335,130.421 h0.3
J3: Mechanical 1 "Mech 2 - Clearance, move to internal plane if present" at 341.154,153.061 h0.3 r270; Mechanical 1 "Mech 1 - Slot cut-out" at 341.654,153.061 h0.3 r270; Mechanical 1 "Assign keep-out area to slot" at 343.154,153.061 h0.3 r270; Mechanical 1 "Slot 1.2x2.5mm, PTH" at 342.154,153.061 h0.3 r270; Mechanical 1 "Alert PCB fab to slot details" at 342.654,153.061 h0.3 r270